# Altium PCB SimpleFOCShieldV3.PcbDoc_2024-06-23.pcbdoc
Units mm, origin at the board's own origin, x right, y up, seen from the top; angles counter-clockwise.
Board outline 81.88 x 79.65 mm, 2 copper layers (Top Layer, Bottom Layer); 47 components, 66 nets, 180 pads, 84 vias.
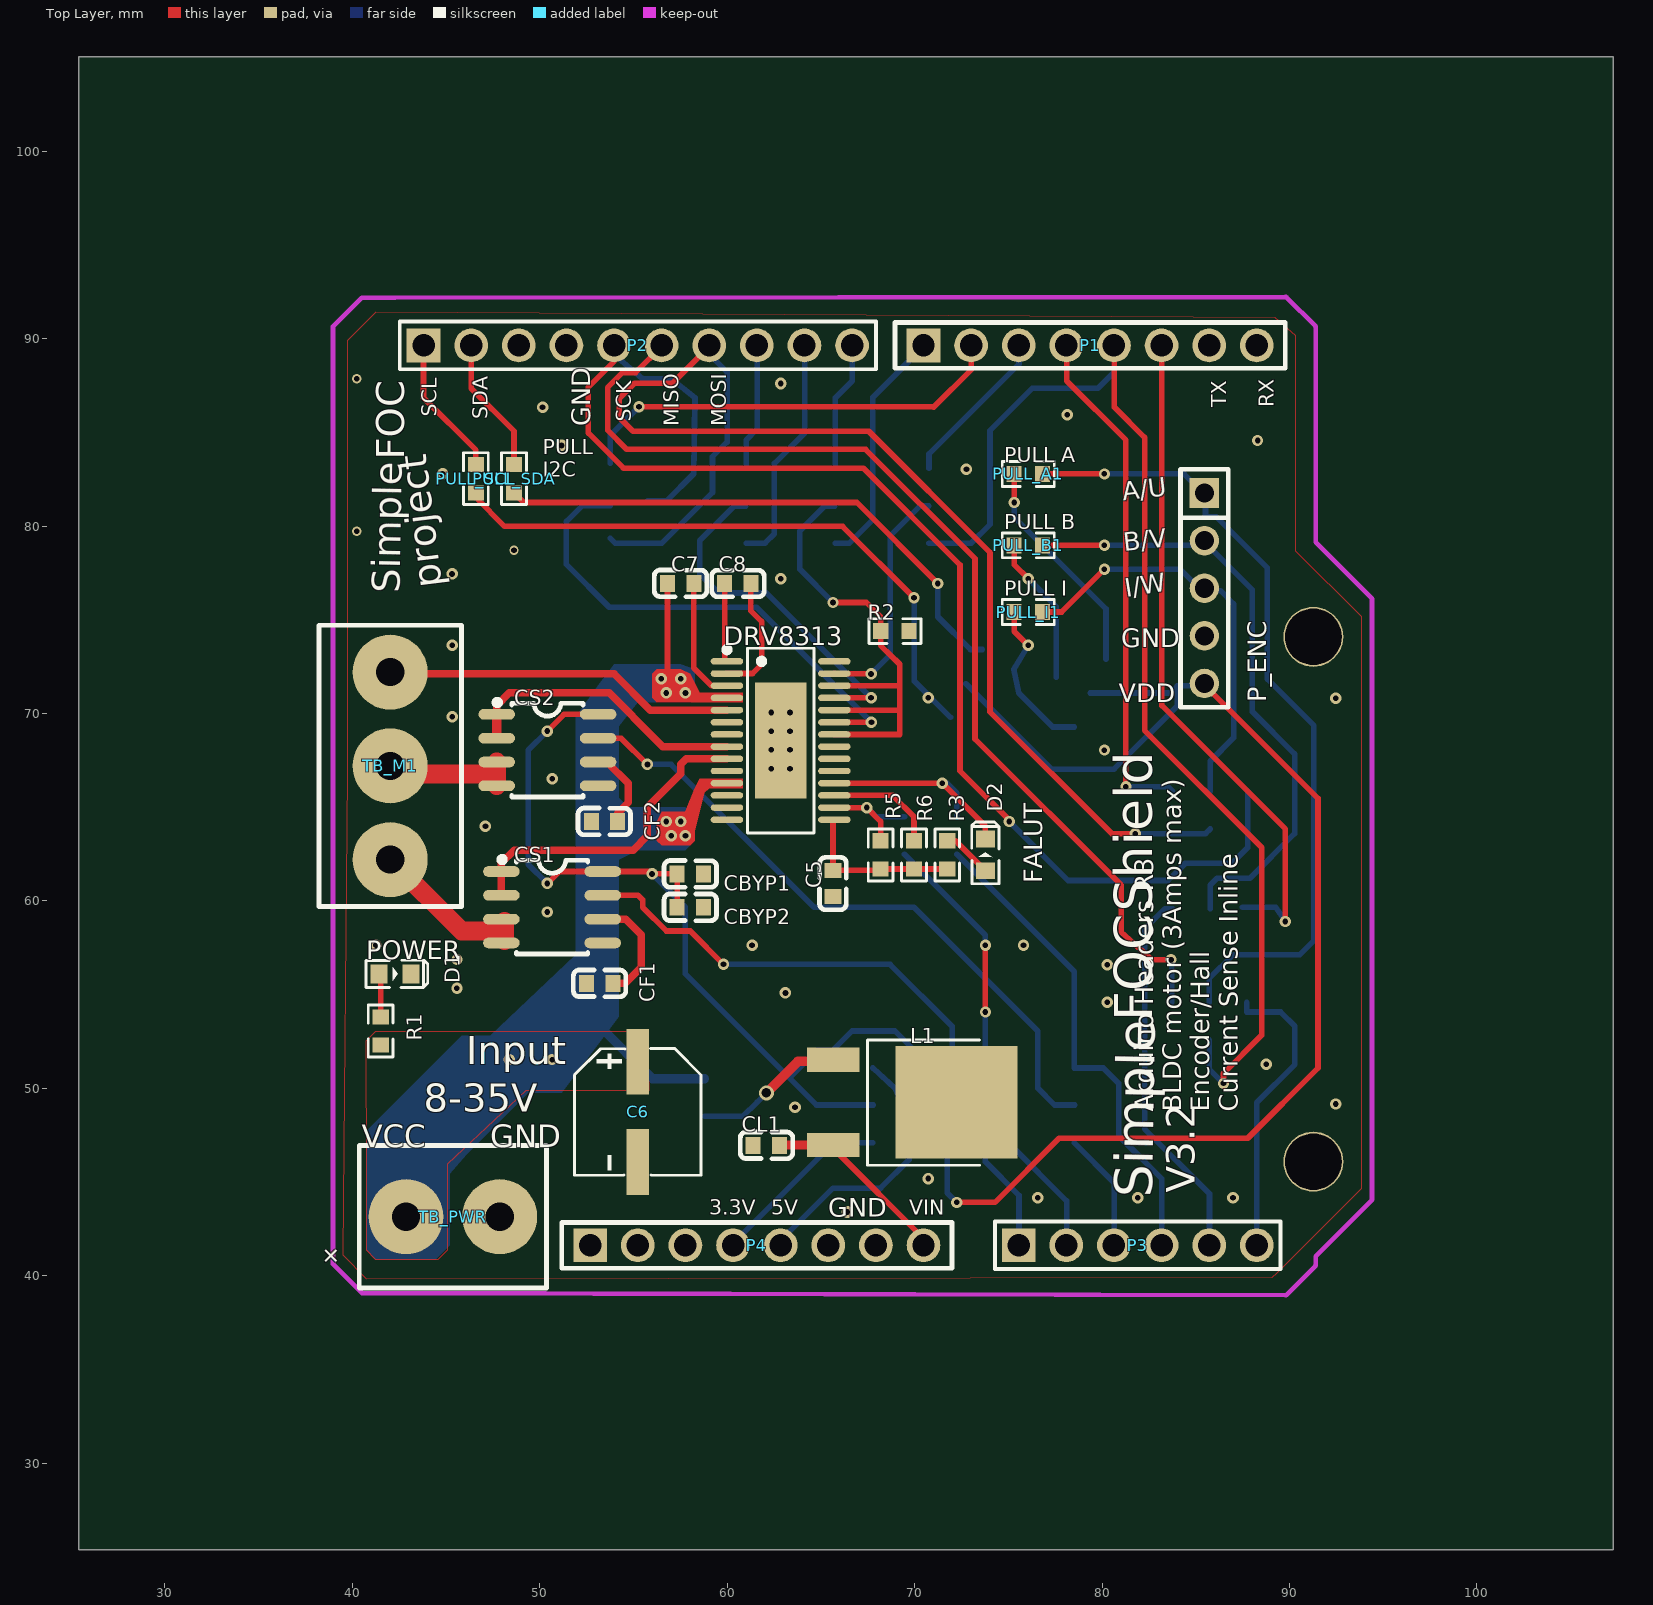
[diagram p0: Top Layer view]
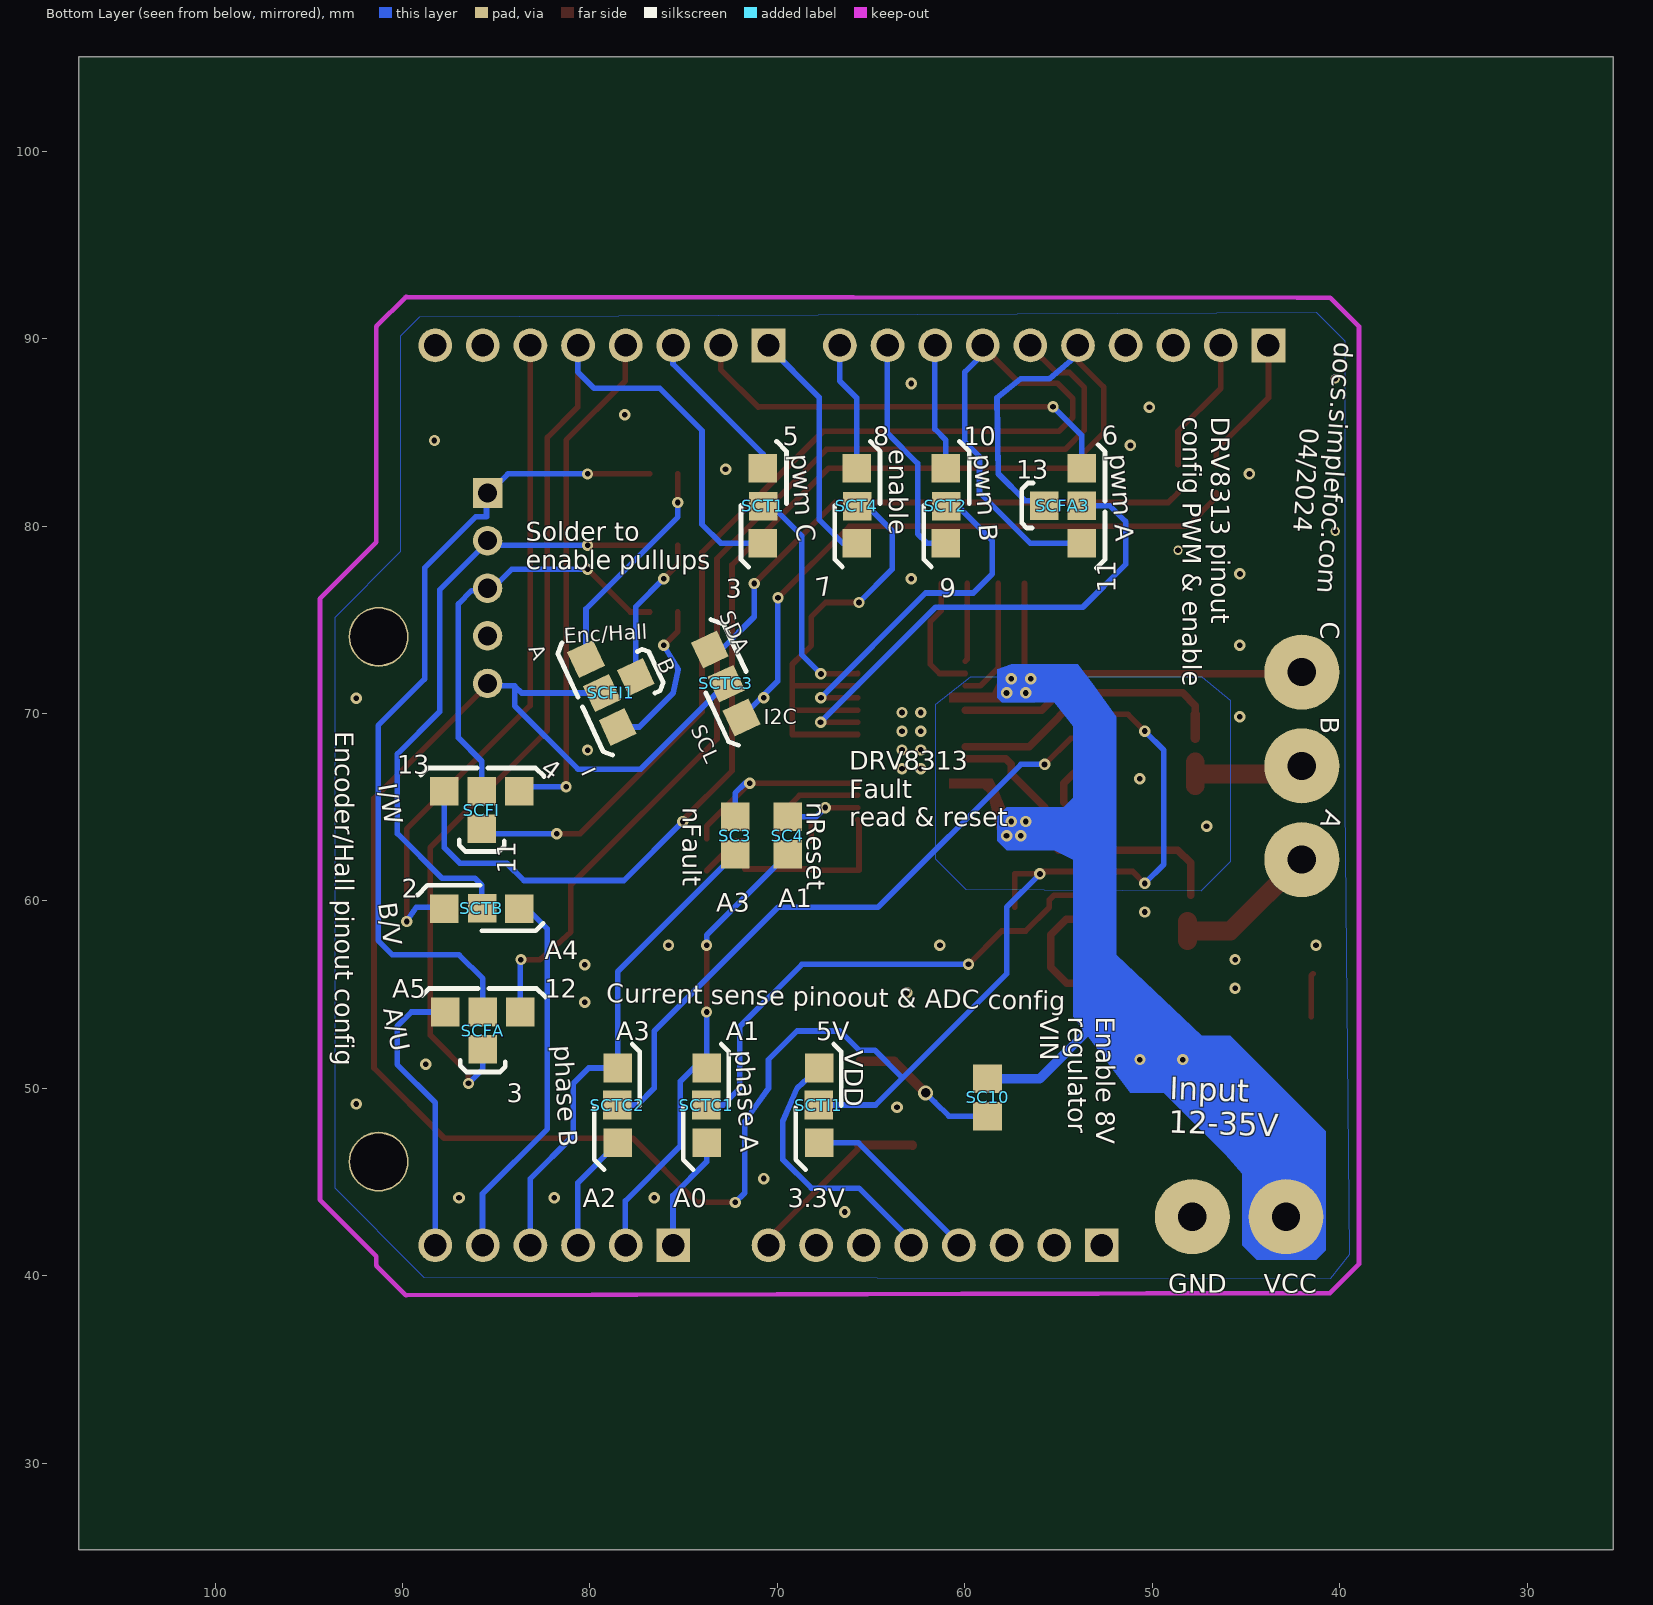
[diagram p1: Bottom Layer view, seen from below]

## Layer stack, top to bottom
Top Layer: signal copper (thickness not stored)
Dielectric: dielectric 0.32, FR-4, Dk 4.8
Bottom Layer: signal copper (thickness not stored)

## Board outline
107.281,25.4 25.4,25.4 25.4,105.046 107.281,105.046

## Components (designator, comment, footprint, x,y, rotation, side; value= is the part's Value field where it differs from the comment)
C5 "470nF" C0603 65.649,60.936 r90 top
C6 "100uF" CAP-SMD_BD6.3-L6.6-W6.6-FD 55.235,48.744 r270 top
C7 "100nF" C0603 57.521,76.938 r0 top
C8 "100nF" C0603 60.569,76.938 r180 top
CBYP1 "1uF" C0603 58.028,61.443 r180 top
CBYP2 "1uF" C0603 58.028,59.665 r180 top
CF1 "1nF" C0603 53.202,55.601 r0 top
CF2 "1nF" C0603 53.456,64.237 r0 top
CL1 "0.1u" C0603 62.092,46.965 r180 top
CS1 "ACS712ELCTR-05B-T" SOIC-8_L5.0-W4.0-P1.27-LS6.0-BL 50.663,59.666 r270 top
CS2 "ACS712ELCTR-05B-T" SOIC-8_L5.0-W4.0-P1.27-LS6.0-BL 50.409,68.048 r270 top
D1 "LED-0603_R" LED0603_RED 42.281,56.11 r0 top
D2 "LED-0603_R" LED0603_RED 73.777,62.46 r90 top
DRV8313 "DRV8313PWPR" HTSSOP-28_L9.8-W4.5-P0.65-LS6.6-BL-EP 62.854,68.557 r270 top
L1 "L78M08CDT-TR" TO-252-2_L6.6-W6.1-P4.57-LS9.9-TL-CW 68.951,49.252 r0 top
P1 "Header-Female-2.54_1x8" HDR-TH_8P-P2.54-V-F-1 79.365,89.638 r0 top
P2 "Header-Male-2.54_1x10" HDR-TH_10P-P2.54-V-M-1 55.235,89.638 r0 top
P3 "HEADER_6" HDR-M-2.54_1X6 81.905,41.632 r0 top
P4 "Header-Female-2.54_1x8" HDR-TH_8P-P2.54-V-F-1 61.585,41.632 r0 top
P_ENC "Header-Female-2.54_1x5" HDR-TH_5P-P2.54-V-F 85.46,76.683 r270 top
PULL_A1 "3.3k" R0603 76.062,82.779 r0 top
PULL_B1 "3.3k" R0603 76.062,78.969 r0 top
PULL_I1 "3.3k" R0603 76.062,75.413 r0 top
PULL_SCL "4.7k" R0603 46.599,82.526 r90 top
PULL_SDA "4.7k" R0603 48.631,82.526 r90 top
R1 "4.7k" R0603 41.518,53.061 r270 top
R2 "4.7kΩ" R0603 68.95,74.397 r180 top
R3 "330Ω" R0603 71.744,62.459 r90 top
R5 "4.7kΩ" R0603 68.188,62.459 r90 top
R6 "4.7kΩ" R0603 69.966,62.459 r90 top
SC3 "solder_connection" SOLDER_CONNECTION 72.253,64.492 r90 bottom
SC4 "solder_connection" SOLDER_CONNECTION 69.459,64.492 r90 bottom
SC10 "solder_connection" SOLDER_CONNECTION 58.791,50.522 r90 bottom
SCFA "solder_connection_four" SOLDER_CONNECTION_FOUR 85.715,54.078 r0 bottom
SCFA3 "solder_connection_four" SOLDER_CONNECTION_FOUR 53.771,81.092 r90 bottom
SCFI "solder_connection_four" SOLDER_CONNECTION_FOUR 85.77,65.842 r0 bottom
SCFI1 "solder_connection_four" SOLDER_CONNECTION_FOUR 79.365,71.096 r245 bottom
SCT1 "solder_connection_tripple" SOLDER_CONNECTION_TRIPPLE 70.771,81.092 r90 bottom
SCT2 "solder_connection_tripple" SOLDER_CONNECTION_TRIPPLE 61.02,81.092 r90 bottom
SCT4 "solder_connection_tripple" SOLDER_CONNECTION_TRIPPLE 65.77,81.092 r90 bottom
SCTB "solder_connection_tripple" SOLDER_CONNECTION_TRIPPLE 85.77,59.591 r0 bottom
SCTC1 "solder_connection_tripple" SOLDER_CONNECTION_TRIPPLE 73.771,49.091 r270 bottom
SCTC2 "solder_connection_tripple" SOLDER_CONNECTION_TRIPPLE 78.521,49.091 r270 bottom
SCTC3 "solder_connection_tripple" SOLDER_CONNECTION_TRIPPLE 72.761,71.604 r65 bottom
SCTI1 "3.3 or 5 v" SOLDER_CONNECTION_TRIPPLE 67.772,49.091 r270 bottom
TB_M1 "TB002-500-03BE" TB002-500-03BE 42.027,62.206 r90 top
TB_PWR "TB002-500-02BE" TB002-500-02BE 47.869,43.156 r180 top

## Footprints (in the part's own frame and the unit in brackets; to place one, negate y for a bottom-side part, rotate by r counter-clockwise, add the part's x,y. Pads: shape width x height; smd on the part's side, far side on the other; paste and mask are expansions set on the pad)
C0603 [mm]
  rect 0.8x0.9 smd paste+0 mask+0.051: 1(-0.7,0) 2(0.7,0)
  silkscreen extent -1.41,-0.71 1.39,0.72
CAP-SMD_BD6.3-L6.6-W6.6-FD [mm]
  rect 3.5x1.2 smd paste+0 mask+0.051: 1(-2.67,0) 2(2.67,0)
  silkscreen extent -3.38,-3.38 3.38,3.38
HDR-M-2.54_1X6 [mm]
  rect 1.8x1.8 hole 1.2 paste+0 mask+0.051: 1(-6.35,0)
  round 1.8 hole 1.2 paste+0 mask+0.051: 2(-3.81,0) 3(-1.27,0) 4(1.27,0) 5(3.81,0) 6(6.35,0)
  silkscreen extent -7.62,-1.27 7.62,1.27
HDR-TH_5P-P2.54-V-F [mil]
  rect 62x62 hole 40.16 paste+0 mask+2: 1(-200,0)
  round 62 hole 40.16 paste+0 mask+2: 2(-100,0) 3(0,0) 4(100,0) 5(200,0)
  silkscreen extent -250,-50 250,50
HDR-TH_8P-P2.54-V-F-1 [mm]
  rect 1.8x1.8 hole 1.2 paste+0 mask+0.051: 1(-8.89,0)
  round 1.8 hole 1.2 paste+0 mask+0.051: 2(-6.35,0) 3(-3.81,0) 4(-1.27,0) 5(1.27,0) 6(3.81,0) 7(6.35,0) 8(8.89,0)
  silkscreen extent -10.41,-1.22 10.41,1.22
HDR-TH_10P-P2.54-V-M-1 [mm]
  rect 1.8x1.8 hole 1.2 paste+0 mask+0.051: 1(-11.43,0)
  round 1.8 hole 1.2 paste+0 mask+0.081: 2(-8.89,0) 3(-6.35,0) 4(-3.81,0) 5(-1.27,0) 6(1.27,0) 7(3.81,0) 8(6.35,0) 9(8.89,0) 10(11.43,0)
  silkscreen extent -12.7,-1.27 12.7,1.27
HTSSOP-28_L9.8-W4.5-P0.65-LS6.6-BL-EP [mm]
  oval 0.343x1.731 smd paste+0 mask+0.051: 1(-4.225,-2.866) 2(-3.575,-2.866) 3(-2.925,-2.866) 4(-2.275,-2.866) 5(-1.625,-2.866) 6(-0.975,-2.866) 7(-0.325,-2.866) 8(0.325,-2.866) 9(0.975,-2.866) 10(1.625,-2.866) 11(2.275,-2.866) 12(2.925,-2.866) 13(3.575,-2.866) 14(4.225,-2.866) 15(4.225,2.866) 16(3.575,2.866) 17(2.925,2.866) 18(2.275,2.866) 19(1.625,2.866) 20(0.975,2.866) 21(0.325,2.866) 22(-0.325,2.866) 23(-0.975,2.866) 24(-1.625,2.866) 25(-2.275,2.866) 26(-2.925,2.866) 27(-3.575,2.866) 28(-4.225,2.866)
  rect 6.2x2.75 smd paste+0 mask+0.051: 29(0,0)
  silkscreen extent -5,-3.02 4.93,1.77
LED0603_RED [mm]
  rect 0.9x1 smd paste+0 mask+0.051: 1(-0.85,0) 2(0.85,0)
  silkscreen extent -1.54,-0.73 1.75,0.73
R0603 [mm]
  rect 0.806x0.864 smd paste-100 mask+0.051: 1(-0.753,0) 2(0.753,0)
  silkscreen extent -1.39,-0.66 1.39,0.66
SOIC-8_L5.0-W4.0-P1.27-LS6.0-BL [mil]
  oval 22.38x76.78 smd paste+0 mask+2: 1(-75,-106.5) 2(-25,-106.5) 3(25,-106.5) 4(75,-106.5) 5(75,106.5) 6(25,106.5) 7(-25,106.5) 8(-75,106.5)
  silkscreen extent -106,-111 98,75
SOLDER_CONNECTION [mil]
  rect 60x60 smd paste+0 mask+2: 1(0,0) 2(-78.74,0)
SOLDER_CONNECTION_FOUR [mil]
  rect 60x60 smd paste+0 mask+2: 1(0,0) 2(-78.74,0) 3(78.74,0) 4(0,78.74)
  silkscreen extent -131,-49 128,126
SOLDER_CONNECTION_TRIPPLE [mil]
  rect 60x60 smd paste+0 mask+2: 1(-0.98,-0.98) 2(-78.74,0) 3(78.74,0)
  silkscreen extent -129,-49 135,46
TB002-500-02BE [mm]
  round 4 hole 1.5 paste+0 mask+0.051: 1(0,0) 2(5,0)
  silkscreen extent -2.5,-3.8 7.5,3.8
TB002-500-03BE [mm]
  round 4 hole 1.5 paste+0 mask+0.051: 1(0,0) 2(5,0) 3(10,0)
  Top Layer lines w0.254: 0,0 0,-0.08
  silkscreen extent -2.5,-3.8 12.5,3.8
TO-252-2_L6.6-W6.1-P4.57-LS9.9-TL-CW [mm]
  rect 2.8x1.3 smd paste+0 mask+0.051: 1(-3.292,2.273) 3(-3.292,-2.273)
  rect 6.5x6 smd paste+0 mask+0.051: 2(3.292,0)
  silkscreen extent -1.46,-3.35 4.51,3.34

## Free pads (board coordinates)
  round 3.2 hole 3 slot 3.005 at 0 deg paste+0 mask+0.102: T2(91.271,74.092) T3(91.271,46.092)

## Via types
v1: diameter 0.6, hole 0.3, Top Layer to Bottom Layer, tented both sides, 41 vias
v2: diameter 0.61, hole 0.305, Top Layer to Bottom Layer, tented both sides, 21 vias
v3: diameter 0.62, hole 0.31, Top Layer to Bottom Layer, tented both sides, 18 vias
v4: diameter 0.5, hole 0.3, Top Layer to Bottom Layer, tented both sides, 3 vias
v5: diameter 0.8, hole 0.5, Top Layer to Bottom Layer, tented both sides, 1 vias

## Nets (pads, with @x,y where several pads share a name; then routed paths per layer and width w, separated by ;. In a path a pad name is that pad's centre, name@x,y a point inside that pad or via, vN(x,y) a via of type N, cw(c..) or ccw(c..) an arc to the next point about the centre after c; other vN are vias at no path point)
3.3V: C5.2 DRV8313.15 P4.4 R3.1 R5.1 R6.1 SCTI1.3 | length 18.6
  Top Layer w0.3: DRV8313.15@65.721,64.331 65.649,64.259 C5.2 68.118,61.636 R5.1 R6.1 R3.1
  Bottom Layer w0.3: P4.4@60.311,41.632 60.311,41.732 65.671,47.092 SCTI1.3
+5V: P4.5 SCTI1.2 | length 14.5
  Bottom Layer w0.3: P4.5 62.855,41.886 65.649,44.68 68.189,44.68 69.713,46.204 69.713,48.236 68.951,50.014 SCTI1.2
C1_OUT: CS1.7 SCTC1.1 | length 27.2
  Top Layer w0.3: CS1.7 55.235,60.301 55.489,60.064 55.489,59.666 56.759,58.396 58.029,58.396 v2(59.807,56.618)
  Bottom Layer w0.3: v2(59.807,56.618) 68.697,56.618 71.999,53.316 71.999,50.014 72.897,49.116 SCTC1.1
C2_OUT: CS2.7 SCTC2.1 | length 35.3
  Top Layer w0.3: CS2.7@53.114,68.683 54.346,68.683 v3(55.743,67.286)
  Bottom Layer w0.3: v3(55.743,67.286) 56.505,67.286 57.013,67.286 64.633,59.666 69.967,59.666 76.571,53.062 76.571,50.014 77.469,49.116 SCTC2.1
C7_2: C7.2 DRV8313.3 | length 6.7
  Top Layer w0.3: C7.2 58.221,72.428 59.167,71.482 DRV8313.3
C8_1: C8.1 DRV8313.2 | length 6.6
  Top Layer w0.3: DRV8313.2 61.351,72.132 61.839,72.62 61.839,74.906 61.269,75.476 C8.1
C8_2: C8.2 DRV8313.1 | length 4.2
  Top Layer w0.3: C8.2 59.869,72.901 DRV8313.1
CF2_2: CF2.2 CS2.6 | length 4.4
  Top Layer w0.4: CS2.6@53.114,67.413 53.584,67.413 54.727,66.27 54.727,65.254 54.157,64.684 CF2.2@54.157,64.238
CS1_6: CF1.2 CS1.6 | length 6
  Top Layer w0.4: CS1.6 54.6,59.031 55.427,58.204 55.427,56.46 54.569,55.602 CF1.2@53.903,55.602
DRV8313_19: DRV8313.19
DRV8313_21: DRV8313.21
EN: DRV8313.22 DRV8313.24 DRV8313.26 R2.2 SCT4.1 | length 27.4
  Top Layer w0.3: v1(65.649,75.922) 67.427,75.922 68.198,75.151 R2.2@68.198,74.398 ; DRV8313.22@65.721,68.881 69.205,68.881 69.205,70.334 ; DRV8313.24@65.721,70.181 69.205,70.181 69.205,71.481 DRV8313.26@65.721,71.481 ; R2.2@68.189,74.398 68.189,73.636 69.205,72.624 69.205,71.218
  Bottom Layer w0.3: v1(65.649,75.922) 63.871,77.7 63.871,79.732 65.206,81.067 SCT4.1
ENC_A: P_ENC.1 PULL_A1.2 SCFA.1 | length 43.8
  Top Layer w0.3: PULL_A1.2@76.816,82.78 v1(80.127,82.78)
  Bottom Layer w0.3: v1(80.127,82.78) 84.373,82.78 P_ENC.1@85.521,81.632 ; P_ENC.1@85.521,82.092 85.521,80.492 86.101,80.492 88.821,77.772 88.821,71.842 91.303,69.357 91.303,57.888 90.541,57.126 86.985,57.126 85.715,55.856 SCFA.1@85.715,54.586
ENC_B: P_ENC.2 PULL_B1.2 SCTB.1 | length 33.2
  Top Layer w0.3: PULL_B1.2@76.816,78.97 v1(80.127,78.97)
  Bottom Layer w0.3: v1(80.127,78.97) 85.521,78.97 85.521,79.092 88.021,76.592 88.021,70.092 90.271,67.842 90.271,63.592 87.891,61.212 86.141,61.212 85.771,60.842 SCTB.1@85.771,59.592
ENC_I: P_ENC.3 PULL_I1.2 SCFI.1 | length 22.7
  Top Layer w0.3: PULL_I1.2@76.816,75.414 77.841,75.414 v1(80.127,77.7)
  Bottom Layer w0.3: v1(80.127,77.7) 84.163,77.7 85.521,76.342 85.521,76.552 86.311,76.552 87.021,75.842 87.021,68.704 85.771,67.454 SCFI.1
GND: C5.1 C6.2 CBYP1.1 CBYP2.1 CF1.1 CF2.1 CL1.2 CS1.5 CS2.5 D1.2 DRV8313.6 DRV8313.7 DRV8313.10 DRV8313.12 DRV8313.13 DRV8313.14 DRV8313.20 DRV8313.28 DRV8313.29 L1.2 P2.4 P4.6 P4.7 P_ENC.4 R2.1 TB_PWR.1
  other v1: 92.471,49.167 88.763,51.284 80.271,54.592 45.583,55.348 80.271,56.592 45.583,56.872 41.265,57.634 62.354,67.057 63.354,67.057 62.354,68.057 63.354,68.057 80.127,68.048 62.354,69.057 63.354,69.057 62.354,70.057 63.354,70.057 92.471,70.817 70.729,70.842 88.296,84.567 78.146,85.942
  other v2: 63.109,55.094 61.331,57.634 75.809,57.634 50.409,59.412 47.107,63.984 50.663,66.524 45.329,69.826 45.329,73.636
  other v3: 66.411,43.41 76.571,44.172 81.905,44.172 86.985,44.172 70.729,45.188 63.617,48.998 62.855,77.192 45.329,77.446 44.821,82.78 72.761,83.034 51.171,84.304 50.155,86.336 62.855,87.606
  other v4: 48.631,78.716 40.249,79.732 40.249,87.86
INA: DRV8313.23 SCFA3.1 | length 26.7
  Top Layer w0.3: DRV8313.23@65.721,69.531 v3@67.695,69.531
  Bottom Layer w0.3: SCFA3.1 52.277,81.092 51.425,80.24 51.425,77.954 53.711,75.668 61.558,75.668 v3(67.695,69.531)
INB: DRV8313.25 SCT2.1 | length 18.8
  Top Layer w0.3: DRV8313.25@65.721,70.831 v3(67.681,70.842)
  Bottom Layer w0.3: SCT2.1 60.38,81.067 58.537,79.224 58.537,77.446 59.553,76.43 62.093,76.43 v3(67.681,70.842)
INC: DRV8313.27 SCT1.1 | length 12.7
  Top Layer w0.3: DRV8313.27 65.74,72.112 v3(67.681,72.112) v3@67.427,72.112
  Bottom Layer w0.3: v3(67.681,72.112) 68.697,73.128 68.697,79.478 70.286,81.067 SCT1.1
NFLT: D2.2 DRV8313.18 SC3.1 | length 11.9
  Top Layer w0.3: DRV8313.18 v2(71.479,66.282) 73.777,63.984 D2.2@73.777,63.311
  Bottom Layer w0.3: v2(71.479,66.282) 71.733,66.282 72.253,65.762 SC3.1
NRST: DRV8313.16 R5.2 SC4.1 | length 6
  Top Layer w0.3: DRV8313.16@65.721,64.981 v2(67.446,64.981) 68.189,64.238 R5.2
  Bottom Layer w0.3: v2(67.446,64.981) 67.935,64.492 SC4.1
NSLP: DRV8313.17 R6.2 | length 6
  Top Layer w0.3: DRV8313.17 68.828,65.631 69.967,64.492 R6.2
P1_7: P1.7
P1_8: P1.8
P2_3: P2.3
P4_1: P4.1
P4_2: P4.2
P4_3: P4.3
PH_A: CS1.3 CS1.4 TB_M1.1 | length 8.6
  Top Layer w1: TB_M1.1 45.837,58.396 47.958,58.396 47.869,58.396 ; CS1.4@48.123,57.888 CS1.3@48.123,58.904
PH_A_CS: CS1.1 CS1.2 DRV8313.9 | length 17.3
  Top Layer w0.4: CS1.2 CS1.1 47.958,62.041 48.631,62.714 54.981,62.714 55.743,63.476 55.743,65 57.521,66.778 57.521,67.286 57.816,67.581 DRV8313.9
PH_B: CS2.3 CS2.4 TB_M1.2 | length 7.8
  Top Layer w1: TB_M1.2 42.455,66.778 45.075,66.778 47.704,66.778 47.704,66.143 CS2.3@47.704,67.413
PH_B_CS: CS2.1 CS2.2 DRV8313.8 | length 15.5
  Top Layer w0.4: CS2.1@47.704,69.953 47.704,70.423 48.377,71.096 53.711,71.096 56.251,68.556 56.576,68.231 DRV8313.8
  Top Layer w0.5: CS2.2@47.704,68.683 CS2.1@47.704,69.953
PH_C: DRV8313.5 TB_M1.3 | length 18.8
  Top Layer w0.4: TB_M1.3 42.121,72.112 53.965,72.112 55.896,70.181 DRV8313.5@59.989,70.181
PIN2: P1.6 SCTB.3 | length 36.1
  Top Layer w0.3: P1.6@83.191,89.592 83.191,70.422 89.779,63.834 v1(89.779,58.904)
  Bottom Layer w0.3: SCTB.3@87.493,59.666 89.271,59.666 v1(89.779,58.904)
PIN3: P1.5 SCFA.4 SCT1.2 | length 64
  Top Layer w0.3: P1.5@80.651,89.592 80.651,86.343 82.271,84.723 82.271,69.092 88.521,62.842 88.521,52.842 86.477,50.798 v1(86.477,50.268)
  Bottom Layer w0.3: SCT1.2 73.021,79.092 74.021,80.092 74.021,85.092 76.271,87.342 79.771,87.342 80.651,88.222 P1.5@80.651,89.592 ; SCFA.4@85.715,52.586 85.715,51.03 v1(86.477,50.268)
PIN4: P1.4 SCFI.2 | length 27.2
  Top Layer w0.3: P1.4@78.111,89.592 78.111,87.752 81.271,84.592 v1@81.271,66.342
  Bottom Layer w0.3: v1(81.271,66.092) 83.521,66.092 SCFI.2@83.771,65.842
PIN5: P1.3 SCT1.3 | length 8.5
  Bottom Layer w0.3: SCT1.3 70.771,83.842 75.571,88.642 P1.3@75.571,89.592
PIN6: P1.2 SCFA3.3 | length 23.5
  Top Layer w0.3: v1(55.296,86.367) 70.996,86.367 71.021,86.342 73.031,88.352 P1.2@73.031,89.592
  Bottom Layer w0.3: SCFA3.3@53.771,83.342 53.771,84.842 v1(55.296,86.367)
PIN7: P1.1 SCT4.2 | length 12.9
  Bottom Layer w0.3: SCT4.2 66.521,79.092 67.771,80.342 67.771,86.872 P1.1@70.491,89.592
PIN8: P2.10 SCT4.3 | length 6.9
  Bottom Layer w0.3: SCT4.3 65.771,86.842 66.681,87.752 P2.10@66.681,89.592
PIN9: P2.9 SCT2.2 | length 12.4
  Bottom Layer w0.3: SCT2.2 62.021,79.092 62.521,79.592 62.521,83.342 64.141,84.962 P2.9@64.141,89.592
PIN10: P2.8 SCT2.3 | length 6.7
  Bottom Layer w0.3: SCT2.3 61.021,84.592 61.601,85.172 P2.8@61.601,89.592
PIN11: P2.7 SCFA3.2 SCFI.4 | length 68
  Top Layer w0.3: P2.7@59.061,89.592 57.096,87.627 55.071,87.627 54.246,86.802 54.246,85.792 54.981,85.057 67.556,85.057 74.021,78.592 74.021,70.09 80.519,63.592 v1(81.771,63.592)
  Bottom Layer w0.3: SCFA3.2@53.771,79.342 54.021,79.092 56.521,79.092 59.221,81.792 59.221,83.702 59.996,84.477 59.996,88.217 59.221,88.992 59.221,89.432 P2.7@59.061,89.592 ; v1(81.771,63.592) 85.521,63.592 SCFI.4
PIN12: P2.6 SCFA.2 | length 57.2
  Top Layer w0.3: P2.6@56.521,89.592 55.121,88.192 54.421,88.192 53.621,87.392 53.621,85.117 54.646,84.092 67.39,84.092 73.221,78.261 73.221,68.642 81.021,60.842 81.021,58.342 82.667,56.872 83.175,56.872 v1(83.683,56.872)
  Bottom Layer w0.3: v1(83.683,56.872) 83.715,56.84 SCFA.2@83.715,54.586
PIN13: P2.5 SCFA3.4 SCFI.3 | length 73
  Top Layer w0.3: P2.5@54.211,89.362 53.981,89.132 53.981,88.802 52.596,87.417 52.596,84.967 54.471,83.092 67.258,83.092 72.421,77.929 72.421,66.942 75.047,64.316 v1(75.047,64.238)
  Bottom Layer w0.3: P2.5@53.981,89.592 53.981,89.132 55.489,87.86 57.013,87.86 58.283,86.844 58.221,82.792 56.771,81.342 SCFA3.4@55.771,81.342 ; v1(75.047,64.238) 78.193,61.092 83.521,61.092 84.441,62.012 86.941,62.012 87.771,62.842 SCFI.3@87.771,65.842
PINA0: P3.1 SCTC1.3 | length 6.5
  Bottom Layer w0.3: SCTC1.3@73.771,47.342 73.771,46.092 75.571,44.292 P3.1@75.571,41.632
PINA1: P3.2 SC4.2 SCTC1.2 | length 25.1
  Top Layer w0.3: v1(73.777,54.078) v1(73.777,57.634)
  Bottom Layer w0.3: SC4.2 73.777,58.174 v1(73.777,57.634) ; SCTC1.2 73.777,51.097 v1(73.777,54.078) ; SCTC1.2@73.771,51.342 73.771,51.092 74.464,51.092 75.183,50.373 75.183,46.93 78.111,44.002 P3.2@78.111,41.632
PINA2: P3.3 SCTC2.3 | length 6.3
  Bottom Layer w0.3: SCTC2.3 80.651,44.962 P3.3@80.651,41.632
PINA3: P3.4 SC3.2 SCTC2.2 | length 26.3
  Bottom Layer w0.3: SC3.2 78.521,56.224 SCTC2.2 ; SCTC2.2@78.521,51.092 80.065,51.092 80.889,50.268 80.889,47.474 83.191,45.172 P3.4@83.191,41.632
PINA4: P3.5 SCTB.2 | length 20.3
  Bottom Layer w0.3: SCTB.2@83.771,59.592 83.355,59.592 82.271,58.508 82.271,47.842 85.731,44.382 P3.5@85.731,41.632
PINA5: P3.6 SCFA.3 | length 15.9
  Bottom Layer w0.3: SCFA.3@87.715,54.586 SCFA.3 89.525,54.078 90.287,53.316 90.287,51.284 88.255,49.252 P3.6
PULL_SCL_1: PULL_SCL.1 SCTC3.2 | length 33
  Top Layer w0.3: PULL_SCL.1 46.598,81.515 48.127,79.986 66.157,79.986 v1(69.967,76.176)
  Bottom Layer w0.3: v1@69.979,76.167 69.979,71.728 SCTC3.2
PULL_SDA_1: PULL_SDA.1 SCTC3.3 | length 29.5
  Top Layer w0.3: PULL_SDA.1 49.148,81.256 66.919,81.256 v1(71.237,76.938)
  Bottom Layer w0.3: v1(71.237,76.938) 71.237,75.16 72.98,73.417 SCTC3.3
R1_1: D1.1 R1.1 | length 2.3
  Top Layer w0.3: D1.1 41.528,56.013 R1.1@41.528,53.824
R3_2: D2.1 R3.2 | length 2.7
  Top Layer w0.3: R3.2 72.174,63.212 D2.1
S$1126: 
S$8786: 
SC10_2: L1.1 SC10.2 | length 8
  Top Layer w0.5: v5(62.093,49.76) 63.775,51.442 L1.1@65.596,51.442
  Bottom Layer w0.3: SC10.2 60.855,48.522 61.585,49.252 v5(62.093,49.76)
SCFI1_2: PULL_A1.1 SCFI1.2 | length 11.9
  Top Layer w0.3: v1(75.31,81.256) PULL_A1.1@75.31,82.78
  Bottom Layer w0.3: v1(75.31,81.256) 75.31,80.485 80.21,75.585 SCFI1.2
SCFI1_3: PULL_I1.1 SCFI1.3 | length 8.6
  Top Layer w0.3: PULL_I1.1@75.31,75.414 75.31,74.389 v1(76.063,73.636)
  Bottom Layer w0.3: v1(76.063,73.636) 75.301,72.366 75.555,71.096 77.368,69.283 SCFI1.3
SCFI1_4: PULL_B1.1 SCFI1.4 | length 8
  Top Layer w0.3: PULL_B1.1@75.31,78.97 75.31,77.945 v1(76.063,77.192)
  Bottom Layer w0.3: v1(76.063,77.192) 77.552,75.703 SCFI1.4
SCL: P2.1 PULL_SCL.2 | length 7.5
  Top Layer w0.3: P2.1 43.805,86.844 46.599,84.05 PULL_SCL.2
SDA: P2.2 PULL_SDA.2 | length 7.3
  Top Layer w0.3: P2.2 46.345,87.352 48.631,85.066 PULL_SDA.2
VCC: C6.1 C7.1 DRV8313.4 DRV8313.11 R1.2 SC10.1 TB_PWR.2 | length 12.3
  Top Layer w0.3: v2(56.488,71.851) 56.821,72.184 C7.1
  Top Layer w0.5: TB_PWR.2@41.271,43.092 TB_PWR.2@41.271,43.442
  Bottom Layer w0.5: 53.203,53.316 55.997,50.522 SC10.1
  other v1: 48.377,51.538 50.663,51.538
  other v2: 57.013,63.476 57.775,63.476 56.759,64.238 57.521,64.238 56.759,71.096 57.775,71.096 57.521,71.858
VDD: CBYP1.2 CBYP2.2 CS1.8 CS2.8 P_ENC.5 SCFI1.1 SCTC3.1 SCTI1.1 | length 124.2
  Top Layer w0.3: v2(50.409,60.936) 51.044,61.571 CS1.8 55.87,61.571 v3(55.997,61.444) 57.329,61.444 CBYP2.2@57.329,59.666 ; v2(50.409,69.064) 51.298,69.953 CS2.8@53.114,69.953 ; v1(72.253,43.918) 74.285,43.918 77.709,47.342 87.771,47.342 91.521,51.092 91.521,65.472 P_ENC.5@85.521,71.472
  Bottom Layer w0.3: v2(50.409,60.936) 49.393,61.952 49.393,68.048 v2(50.409,69.064) ; v3(55.997,61.444) 57.775,59.666 57.775,56.11 64.769,49.116 SCTI1.1 ; 63.322,50.563 64.805,52.046 65.649,52.046 66.665,53.062 68.951,53.062 70.475,51.538 70.475,50.014 71.745,48.236 71.745,44.426 v1(72.253,43.918) ; SCTC3.1 77.288,67.032 80.635,67.032 84.016,70.413 84.016,71.472 ; SCFI1.1 83.64,71.096 84.016,71.472 ; P_ENC.5@85.521,71.472 84.016,71.472
VIN: CL1.1 L1.3 P4.8 | length 10.1
  Top Layer w0.3: L1.3@65.596,46.87 65.739,46.727 70.471,41.995 P4.8@70.471,41.632
  Top Layer w0.5: CL1.1@62.793,46.966 63.06,46.979 L1.3

## Polygon pours and split planes (outlines as drawn)
GND on Top Layer (solid): 41.265,91.416 39.741,89.892 39.741,66.778 39.487,41.124 40.757,39.854 89.092,39.914 89.342,40.164 93.856,44.677 93.856,75.15 90.342,78.664 90.342,90.164 89.233,91.102
VCC on Top Layer (solid): 41.265,40.87 40.765,41.37 40.765,45.37 40.757,52.554 41.265,53.062 54.473,53.062 55.743,53.062 55.814,49.87 49.265,49.87 45.075,45.95 45.075,41.378 44.567,40.87 41.265,40.87
GND on Bottom Layer (solid): 41.265,91.416 39.741,89.892 39.741,65.254 39.487,41.124 40.503,39.854 88.831,39.903 89.081,40.153 93.595,44.667 93.595,75.14 90.081,78.653 90.081,90.153 89.081,91.153
GND on Bottom Layer (solid): 47.389,60.549 45.821,62.117 45.821,70.692 47.345,71.942 59.7,71.942 61.571,70.473 61.571,62.242 59.944,60.615

## Keep-outs
Keep-Out Layer:
  lines w0.254: 89.771,38.965 ccw(c89.771,39.092) 89.861,39.002 ; 89.771,92.219 cw(c89.771,92.092) 89.861,92.182 ; 91.361,40.501 ccw(c91.271,40.592) 91.398,40.592 ; 91.361,90.682 cw(c91.271,90.592) 91.398,90.592 ; 94.361,44.001 ccw(c94.271,44.092) 94.398,44.092 ; 94.361,76.182 cw(c94.271,76.092) 94.398,76.092

## Other copper
Top Layer:
  region net VCC: 60.823,71.096 60.823,70.842 60.823,70.588 59.045,70.588 58.537,70.588 58.283,70.588 56.251,70.588 55.997,70.842 55.997,72.112 56.251,72.366 57.521,72.366 58.029,72.112 58.283,71.604 58.537,71.096 60.823,71.096
  region net VCC: 58.283,63.222 58.029,62.968 56.505,62.968 56.251,63.222 56.251,64.238 56.505,64.746 57.775,64.746 58.283,66.016 58.537,66.524 60.823,66.524 60.823,66.016 59.045,66.016 58.791,65.762 58.283,63.73 58.283,63.222
Bottom Layer:
  region net VCC: 41.773,40.87 41.265,40.87 40.757,41.378 40.757,47.728 45.837,52.808 47.361,52.808 51.933,57.126 51.933,69.826 53.203,71.604 53.965,72.62 57.521,72.62 58.283,72.366 58.283,70.842 58.029,70.588 55.235,70.588 54.219,69.318 54.219,65.508 54.727,65 57.775,65 58.283,64.492 58.283,63.222 57.775,62.714 55.235,62.714 54.219,62.206 54.219,53.824 51.171,49.76 49.393,49.76 46.091,46.458 45.202,45.442 45.202,41.632 44.44,40.87 41.773,40.87 41.265,40.87

## Silkscreen, mask and mechanical layers (free items; w line width, h text height)
Top Overlay:
  text "TX" at 86.623,86.336 h0.8 r90
  text "RX" at 89.163,86.336 h0.8 r90
  text "SCL" at 44.521,85.818 h0.8 r90
  text "SDA" at 47.22,85.686 h0.8 r90
  text "SCK" at 54.873,85.574 h0.8 r90
  text "GND" at 52.687,85.32 h1 r90
  text "MISO" at 57.413,85.32 h0.8 r90
  text "MOSI" at 59.953,85.32 h0.8 r90
  text "FOC" at 42.777,83.542 h1.5 r90
  text "PULL A" at 74.793,83.396 h0.8
  text "PULL / I2C" at 50.155,82.634 h0.8
  text "A/U" at 81.132,81.346 h1 r7
  text "PULL B" at 74.793,79.84 h0.8
  text "B/V" at 81.173,78.645 h1 r6
  text "project" at 44.804,76.775 h1.5 r97
  text "Simple" at 42.523,76.417 h1.5 r89
  text "PULL I" at 74.793,76.284 h0.8
  text "I/W" at 81.299,76.198 h1 r9
  text "GND" at 81.021,73.542 h1
  text "VDD" at 80.889,70.596 h1
  text "FALUT" at 76.817,60.936 h1 r90
  text "Shield" at 82.667,59.412 h2.03 r90
  text "POWER" at 40.757,56.88 h1
  text "FOC" at 82.667,53.57 h2.03 r90
  text "Input" at 46.091,51.296 h1.5
  text "8-35V" at 43.805,48.756 h1.5
  text "Arduino Headers R3 / BLDC motor (3Amps max) / Encoder/Hall / Current Sense Inline" at 87.231,48.744 h1 r90
  text "VCC" at 40.503,46.874 h1.2
  text "GND" at 47.361,46.874 h1.2
  text "V3.2" at 84.953,44.426 h1.52 r90
  text "Simple" at 82.667,44.154 h2.03 r89
  text "3.3V" at 59.045,43.264 h0.8
  text "5V" at 62.347,43.264 h0.8
  text "VIN" at 69.713,43.264 h0.8
  text "GND" at 65.395,43.164 h1
  text "+" at 39.587,40.97 h1 r135
Bottom Overlay:
  text "docs.simplefoc.com /            04/2024" at 41.764,89.927 h1 r94
  text "DRV8313 pinout  / config PWM & enable" at 48.369,85.828 h1 r90
  text "6" at 52.652,84.314 h1 r355
  text "10" at 60.061,84.312 h1
  text "8" at 64.887,84.312 h1
  text "5" at 69.713,84.312 h1
  text "enable" at 64.021,84.092 h1 r90
  text "pwm A" at 52.27,83.807 h1 r86
  text "pwm B" at 59.52,83.807 h1 r86
  text "pwm C" at 69.27,83.807 h1 r86
  text "13" at 57.267,82.534 h1
  text "Solder to  / enable pullups" at 83.429,77.708 h1
  text "11" at 51.941,76.43 h1 r270
  text "7" at 67.84,76.193 h1 r349
  text "9" at 61.288,76.186 h1 r355
  text "3" at 72.761,76.184 h1
  text "SDA" at 73.124,75.245 h0.8 r65
  text "C" at 41.003,74.906 h1 r90
  text "Enc/Hall" at 81.376,73.744 h0.8 r357
  text "A" at 83.284,73.467 h0.8 r65
  text "B" at 76.426,72.705 h0.8 r65
  text "B" at 41.003,69.826 h1 r90
  text "I2C" at 70.729,69.426 h0.8
  text "SCL" at 74.648,69.149 h0.8 r65
  text "Encoder/Hall pinout config" at 93.581,69.064 h1 r90
  text "4" at 82.707,66.881 h1 r36
  text "I" at 80.49,66.863 h0.8 r65
  text "13" at 90.287,66.786 h1
  text "I/W" at 91.288,66.183 h1 r80
  text "nReset" at 68.435,65.254 h1 r90
  text "nFault" at 75.039,65 h1 r90
  text "A" at 40.716,64.925 h1 r111
  text "DRV8313 / Fault / read & reset" at 66.157,63.992 h1
  text "11" at 83.945,61.444 h1 r270
  text "2" at 90.033,60.182 h1
  text "B/V" at 91.29,59.85 h1 r82
  text "A1" at 69.967,59.674 h1
  text "A3" at 73.269,59.42 h1
  text "A4" at 82.413,56.88 h1
  text "12" at 82.413,54.848 h1
  text "A5" at 90.541,54.848 h1
  text "Current sense pinoout & ADC config" at 79.12,54.594 h1 r1
  text "A/U" at 91.03,54.228 h1 r78
  text "Enable 8V / regulator  / VIN" at 55.989,53.824 h1 r90
  text "5V" at 67.935,52.562 h1
  text "A1" at 72.761,52.562 h1
  text "A3" at 78.603,52.562 h1
  text "phase B" at 81.896,52.274 h1 r87
  text "VDD" at 66.403,52.046 h1 r90
  text "phase A" at 72.244,52.02 h1 r87
  text "3" at 84.445,49.26 h1
  text "Input  / 12-35V" at 49.16,47.636 h1.2 r2
  text "3.3V" at 69.459,43.672 h1
  text "A0" at 75.555,43.672 h1
  text "A2" at 80.381,43.672 h1
  text "VCC" at 44.059,39.1 h1
  text "GND" at 49.139,39.1 h1